# EAGLE board GEN7_Itux_RepRapBoard2-redesign (EAGLE 6.1)
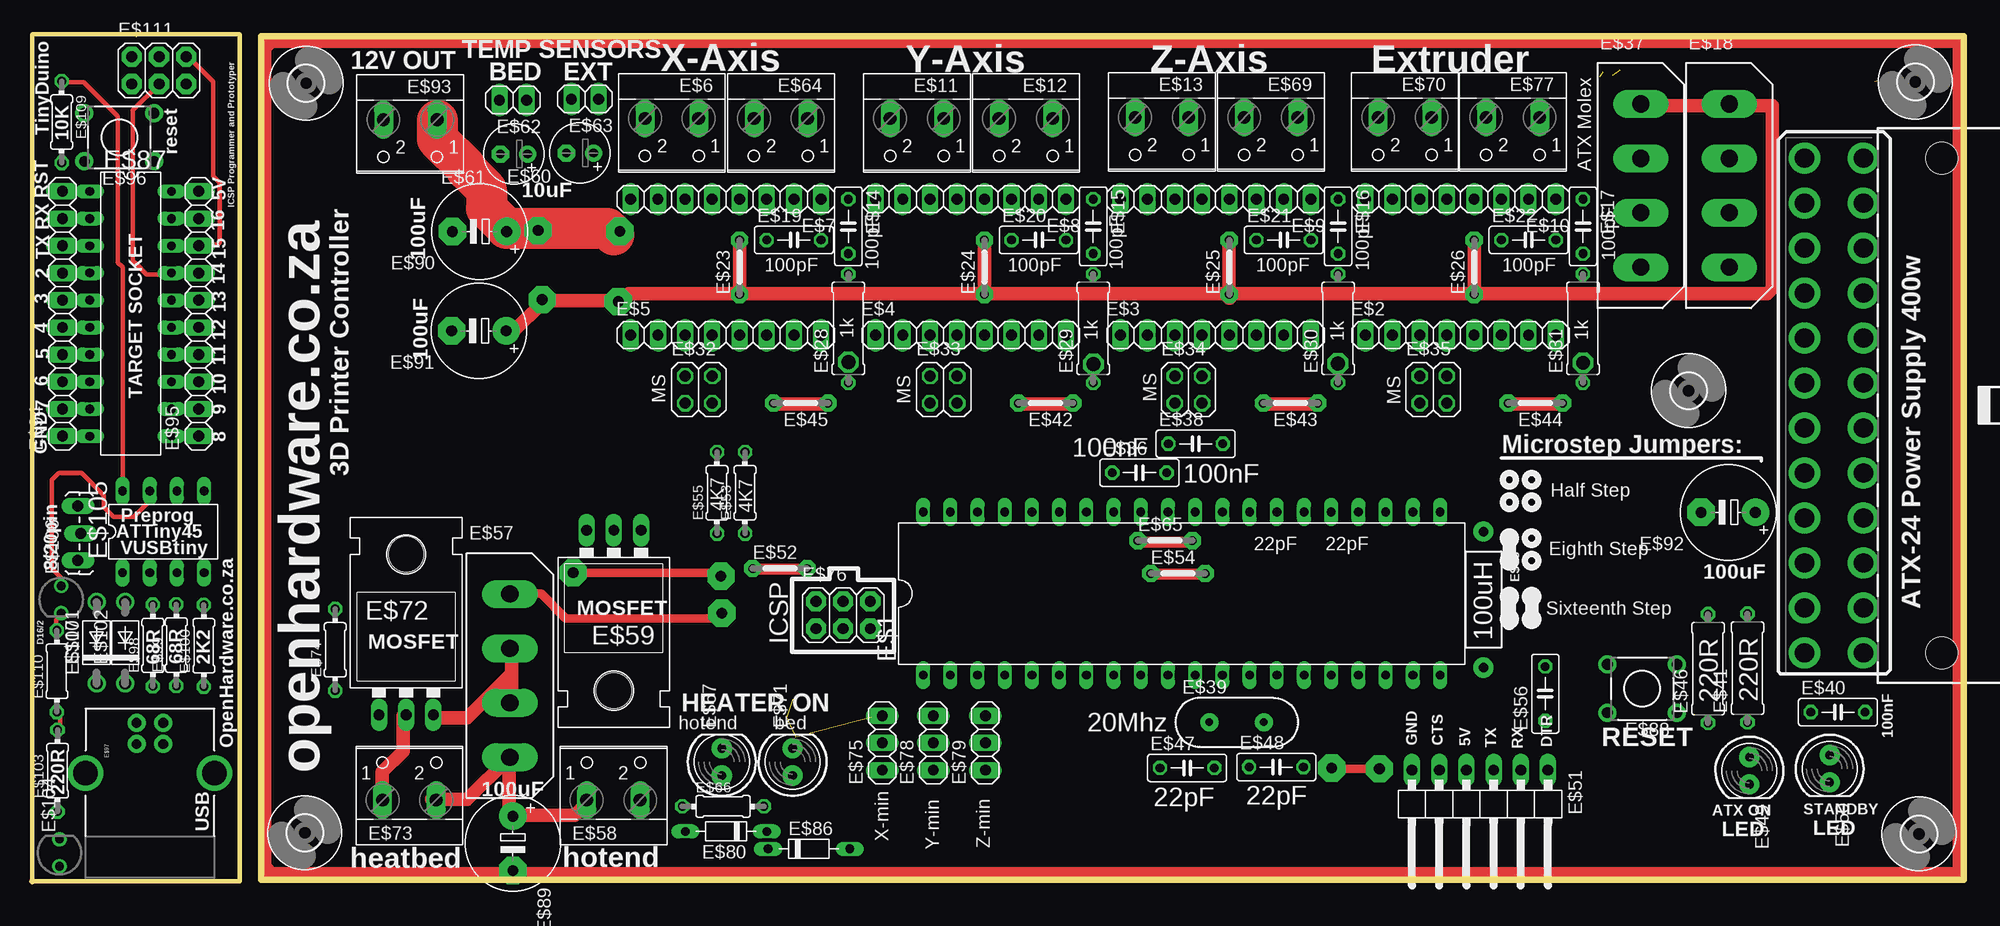
[diagram p0: board, top side]
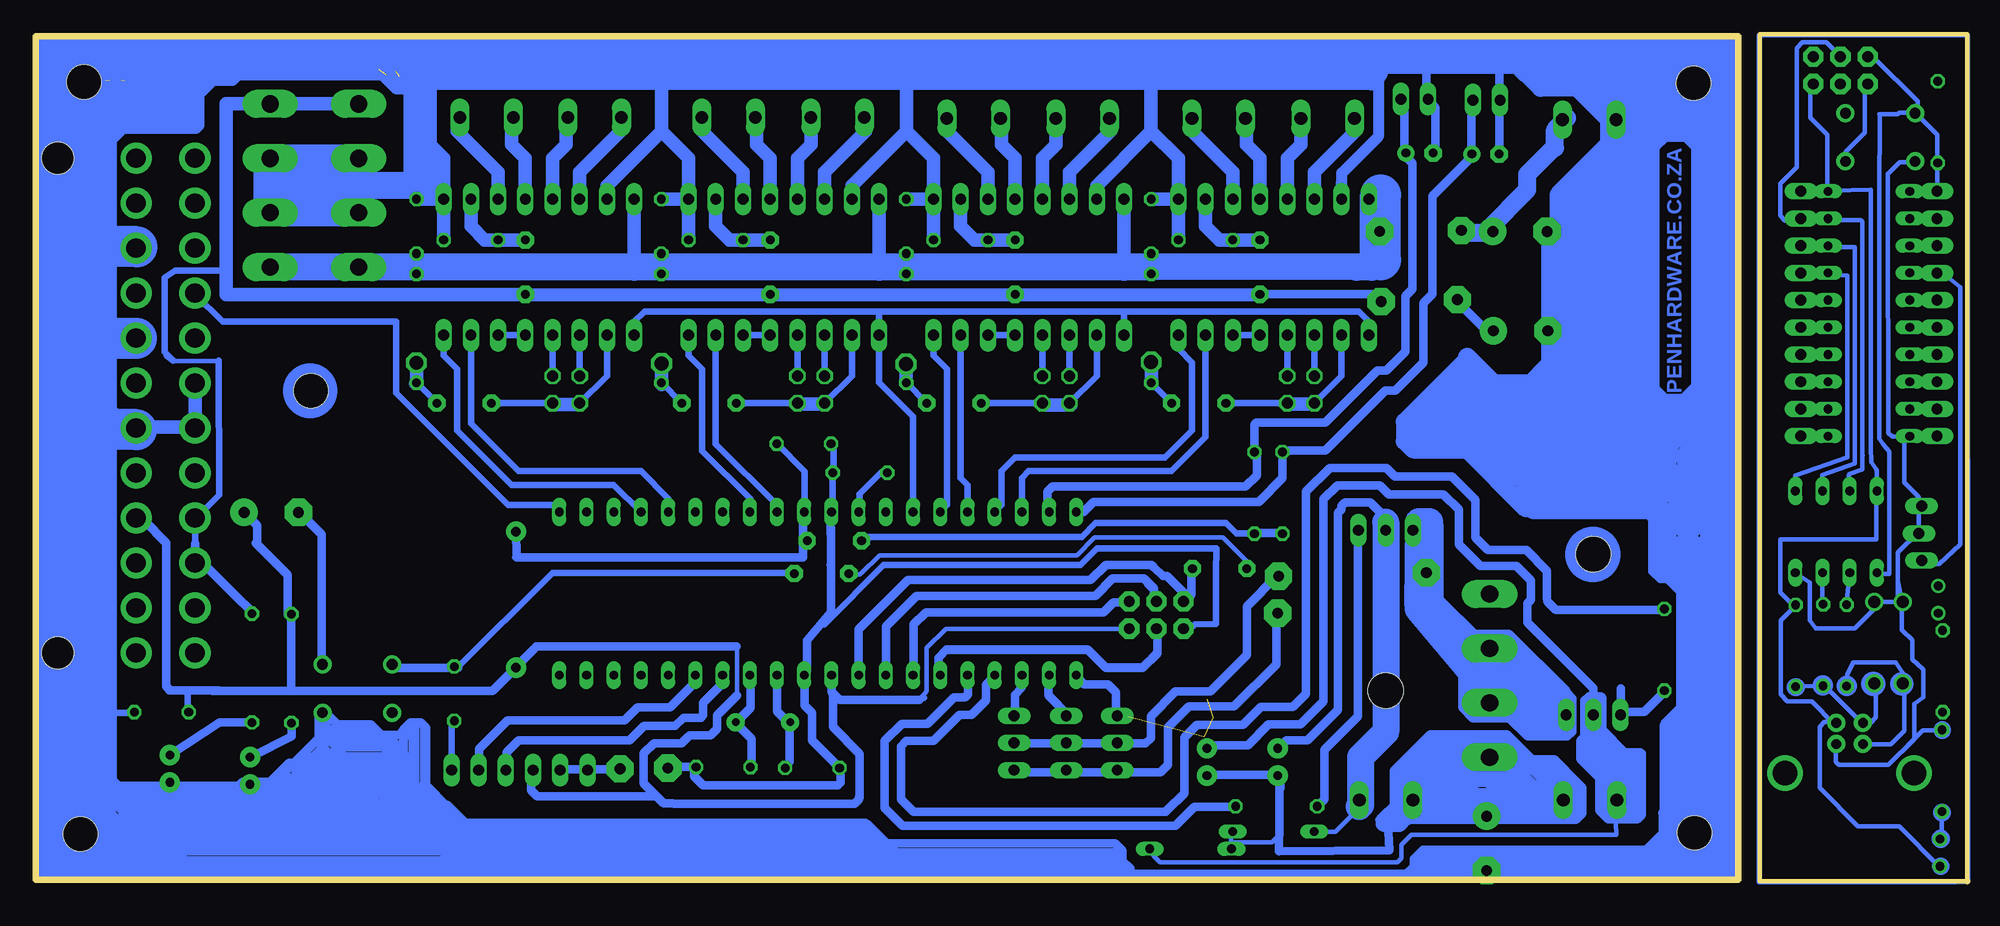
[diagram p1: board, bottom side, seen from below]

Size 180.39 x 79.19 mm. Coordinates in mm from the lower left corner, seen from the top.
Outline: 21.54,0.23 180.39,0.23 180.39,78.96 21.43,78.96 21.43,0.23
Outline: 0,0.08 19.44,0.08 19.44,79.19 0.08,79.19 0.08,0
Copper layers (1*16): Top 0.035mm / dielectric 1.5mm / Bottom 0.035mm
Design rules: minimum track width 10mil, minimum drill 24mil, track to track 8mil, track to pad 8mil, pad to pad 8mil, via to via 8mil, smd to smd 8mil, copper to edge 40mil, drill to drill 8mil, minimum pad ring 10mil, minimum via ring 8mil, stop-mask expansion 4mil, vias tented up to drill 0mil, thermal gap 10mil

## Footprints (pad centres in the part's own frame; a part is rotated, then mirrored left to right if it is on the bottom)
DIL40 = drill 0.813 long: 1 -24.13,-7.62; 2 -21.59,-7.62; 3 -19.05,-7.62; 4 -16.51,-7.62; 5 -13.97,-7.62; 6 -11.43,-7.62; 7 -8.89,-7.62; 8 -6.35,-7.62; 9 -3.81,-7.62; 10 -1.27,-7.62; 11 1.27,-7.62; 12 3.81,-7.62; 13 6.35,-7.62; 14 8.89,-7.62; 15 11.43,-7.62; 16 13.97,-7.62; 17 16.51,-7.62; 18 19.05,-7.62; 19 21.59,-7.62; 20 24.13,-7.62; 21 24.13,7.62; 22 21.59,7.62; 23 19.05,7.62; 24 16.51,7.62; 25 13.97,7.62; 26 11.43,7.62; 27 8.89,7.62; 28 6.35,7.62; 29 3.81,7.62; 30 1.27,7.62; 31 -1.27,7.62; 32 -3.81,7.62; 33 -6.35,7.62; 34 -8.89,7.62; 35 -11.43,7.62; 36 -13.97,7.62; 37 -16.51,7.62; 38 -19.05,7.62; 39 -21.59,7.62; 40 -24.13,7.62
1X08 = drill 1.016 long: 1 -8.89,0; 2 -6.35,0; 3 -3.81,0; 4 -1.27,0; 5 1.27,0; 6 3.81,0; 7 6.35,0; 8 8.89,0
W237-102 = drill 1.194 long: 1 -2.5,-1.27; 2 2.5,-1.27
C050-025X075 = drill 0.813 octagon: 1 -2.54,0; 2 2.54,0
9090-4V = drill 1.6 pad 2.6 long: 1 -7.62,0; 2 -2.54,0; 3 2.54,0; 4 7.62,0
05 = drill 0.813 pad 1.6 octagon: 1 -2.54,0; 2 2.54,0
ATX24_RIGHT_ANGLE = drill 1.8 pad 2.9: 1 23.1,4.76; 2 18.9,4.76; 3 14.7,4.76; 4 10.5,4.76; 5 6.3,4.76; 6 2.1,4.76; 7 -2.1,4.76; 8 -6.3,4.76; 9 -10.5,4.76; 10 -14.7,4.76; 11 -18.9,4.76; 12 -23.1,4.76; 13 23.1,10.26; 14 18.9,10.26; 15 14.7,10.26; 16 10.5,10.26; 17 6.3,10.26; 18 2.1,10.26; 19 -2.1,10.26; 20 -6.3,10.26; 21 -10.5,10.26; 22 -14.7,10.26; 23 -18.9,10.26; 24 -23.1,10.26 | hole 3: -23.1,-2.54; 23.1,-2.54
0309/10 = drill 0.813 octagon: 1 -5.08,0; 2 5.08,0
2X02 = drill 1.016 octagon: 1 -1.27,-1.27; 2 -1.27,1.27; 3 1.27,-1.27; 4 1.27,1.27
HC49US = drill 0.7 pad 1.651: 1 -2.54,0; 2 2.54,0
LED5MM = drill 0.813 pad 1.88: A -1.27,0; K 1.27,0
1X06/90 = drill 1.016 long: 1 -6.35,-3.81; 2 -3.81,-3.81; 3 -1.27,-3.81; 4 1.27,-3.81; 5 3.81,-3.81; 6 6.35,-3.81
0204/7 = drill 0.813 octagon: 1 -3.81,0; 2 3.81,0
TO-220-ALT = drill 1.016 long: GND 0,-3.81; IN -2.54,-3.81; OUT 2.54,-3.81 | hole 3.302: 0,11.176
E2,5-6 = drill 0.813 pad 1.6: + -1.27,0 | drill 0.813 pad 1.6 octagon: - 1.27,0
1X02 = drill 1.016 long: 1 -1.27,0; 2 1.27,0
AXIAL-0.5 = drill 0.9 pad 1.88: P$1 -6.35,0; P$2 6.35,0
1X03 = drill 1.016 long: 1 -2.54,0; 2 0,0; 3 2.54,0
2X03 = drill 1.016 pad 1.88 octagon: 1 -2.54,-1.27; 2 -2.54,1.27; 3 0,-1.27; 4 0,1.27; 5 2.54,-1.27; 6 2.54,1.27
D-7.5 = drill 0.813 long: A 3.81,0; C -3.81,0
3,2 = hole 3.2: 0,0
DIL20 = drill 0.813 long: 1 -11.43,-3.81; 2 -8.89,-3.81; 3 -6.35,-3.81; 4 -3.81,-3.81; 5 -1.27,-3.81; 6 1.27,-3.81; 7 3.81,-3.81; 8 6.35,-3.81; 9 8.89,-3.81; 10 11.43,-3.81; 11 11.43,3.81; 12 8.89,3.81; 13 6.35,3.81; 14 3.81,3.81; 15 1.27,3.81; 16 -1.27,3.81; 17 -3.81,3.81; 18 -6.35,3.81; 19 -8.89,3.81; 20 -11.43,3.81
TL1105 = drill 1 pad 1.676: 1 -2.25,3.25; 2 2.25,3.25; 3 -2.25,-3.25; 4 2.25,-3.25
E5-8,5 = drill 1.016 pad 2.54: + -2.54,0 | drill 1.016 pad 2.54 octagon: - 2.54,0
1X10 = drill 1.016 long: 1 -11.43,0; 2 -8.89,0; 3 -6.35,0; 4 -3.81,0; 5 -1.27,0; 6 1.27,0; 7 3.81,0; 8 6.35,0; 9 8.89,0; 10 11.43,0
USB-B-PTH = drill 0.914 pad 1.676: D+ 0,1.25; D- 1.981,1.25; GND 0,-1.25; VBUS 1.981,-1.25 | drill 2.286: S1 -2.718,-6.02; S2 -2.718,6.02
DO41-7 = drill 1.118: A 3.81,0; C -3.81,0
LED3MM-NS = drill 0.813: A -1.27,0; K 1.27,0
DIL8 = drill 0.813 long: 1 -3.81,-3.81; 2 -1.27,-3.81; 3 1.27,-3.81; 4 3.81,-3.81; 5 3.81,3.81; 6 1.27,3.81; 7 -1.27,3.81; 8 -3.81,3.81
1X03_LOCK_LONGPADS = drill 1.016 long: 1 0,0; 2 2.54,-0.254; 3 5.08,0

## Placement (x,y rotation side)
E$1  [DIL40]  107.37,26.94 0 top
E$2  [1X08]  133.4,51.07 0 top
E$3  [1X08]  110.54,51.07 0 top
E$4  [1X08]  87.68,51.07 0 top
E$5  [1X08]  64.82,51.07 0 top
E$6  [W237-102]  59.78,70.02 180 top
E$7  [1X08]  64.82,63.77 180 top
E$8  [1X08]  87.68,63.77 180 top
E$9  [1X08]  110.54,63.77 180 top
E$10  [1X08]  133.4,63.77 180 top
E$11  [W237-102]  82.65,70.02 180 top
E$12  [W237-102]  92.83,70.02 180 top
E$13  [W237-102]  105.53,70.12 180 top
E$14  [C050-025X075]  76.25,61.23 270 top
E$15  [C050-025X075]  99.11,61.23 270 top
E$16  [C050-025X075]  121.97,61.23 270 top
E$17  [C050-025X075]  144.83,61.23 270 top
E$18  [9090-4V]  158.49,65.04 270 top
E$19  [C050-025X075]  71.17,59.96 0 top
E$20  [C050-025X075]  94.03,59.96 0 top
E$21  [C050-025X075]  116.89,59.96 0 top
E$22  [C050-025X075]  139.75,59.96 0 top
E$23  [05]  66.09,57.42 90 top
E$24  [05]  88.95,57.42 90 top
E$25  [05]  111.81,57.42 90 top
E$26  [05]  134.67,57.42 90 top
E$27  [ATX24_RIGHT_ANGLE]  175.77,44.5 90 top
E$28  [0309/10]  76.25,51.7 90 top
E$29  [0309/10]  99.11,51.7 90 top
E$30  [0309/10]  121.97,51.7 90 top
E$31  [0309/10]  144.83,51.7 90 top
E$32  [2X02]  62.28,45.99 0 top
E$33  [2X02]  85.14,45.99 0 top
E$34  [2X02]  108,45.99 0 top
E$35  [2X02]  130.86,45.99 0 top
E$36  [C050-025X075]  103.43,38.22 0 top
E$37  [9090-4V]  150.23,65.04 270 top
E$38  [C050-025X075]  108.67,40.93 0 top
E$39  [HC49US]  112.5,14.92 0 top
E$40  [C050-025X075]  168.63,15.87 0 top
E$41  [0309/10]  160.19,19.98 90 top
E$42  [05]  94.67,44.72 180 top
E$43  [05]  117.53,44.72 180 top
E$44  [05]  140.39,44.72 180 top
E$45  [05]  71.81,44.72 180 top
E$46  [0309/10]  156.5,19.93 90 top
E$47  [C050-025X075]  107.88,10.65 0 top
E$48  [C050-025X075]  116.2,10.73 0 top
E$49  [LED5MM]  160.37,10.4 270 top
E$50  [LED5MM]  167.86,10.59 270 top
E$51  [1X06/90]  135.22,6.65 180 top
E$52  [05]  69.87,29.27 0 top
E$53  [0204/7]  66.61,36.35 90 top
E$54  [05]  107.03,28.8 0 top
E$55  [0204/7]  64,36.35 90 top
E$56  [C050-025X075]  141.31,17.59 90 top
E$57  [9090-4V]  44.67,19.28 270 top
E$58  [W237-102]  54.33,8.94 0 top
E$59  [TO-220-ALT]  54.37,29.05 180 top
E$60  [E2,5-6]  51.21,68.08 180 top
E$61  [E2,5-6]  45.05,67.98 180 top
E$62  [1X02]  44.95,73.02 180 top
E$63  [1X02]  51.67,73.12 180 top
E$64  [W237-102]  69.96,70.02 180 top
E$65  [05]  105.83,31.88 0 top
E$66  [0204/7]  64.57,7.07 0 top
E$67  [LED5MM]  64.45,11.22 90 top
E$68  [AXIAL-0.5]  135.55,26.37 270 top
E$69  [W237-102]  115.7,70.12 180 top
E$70  [W237-102]  128.21,70.12 180 top
E$71  [LED5MM]  71.06,11.22 90 top
E$72  [TO-220-ALT]  34.98,19.43 0 top
E$73  [W237-102]  35.28,8.94 0 top
E$74  [0204/7]  28.35,21.69 90 top
E$75  [1X03]  79.43,13 90 top
E$76  [2X03]  75.77,24.93 0 top
E$77  [W237-102]  138.29,70.12 180 top
E$78  [1X03]  84.18,13 90 top
E$79  [1X03]  89.04,13 90 top
E$80  [D-7.5]  64.84,4.73 180 top
E$81  [3,2]  25.64,74.59 0 top
E$82  [3,2]  25.52,4.61 0 top
E$83  [3,2]  176.2,4.49 0 top
E$84  [3,2]  175.86,74.71 0 top
E$85  [3,2]  154.69,45.88 0 top
E$86  [D-7.5]  72.57,3.11 0 top
E$87  [DIL20]  9.25,53.07 270 top
E$88  [TL1105]  150.36,18.07 90 top
E$89  [E5-8,5]  44.94,3.62 270 top
E$90  [E5-8,5]  41.83,60.75 180 top
E$91  [E5-8,5]  41.77,51.47 180 top
E$92  [E5-8,5]  158.4,34.53 180 top
E$93  [W237-102]  35.36,69.91 180 top
E$94  [1X10]  2.9,53.07 90 top
E$95  [1X10]  15.6,53.07 90 top
E$96  [TL1105]  8.2,69.55 90 top
E$97  [USB-B-PTH]  11.06,12.89 90 top
E$98  68RD+  [0204/7]  11.33,22.1 90 top
E$99  68Rd-  [0204/7]  13.53,22.13 90 top
E$100  2K2  [0204/7]  16.1,22.06 90 top
E$101  [DO41-7]  6.08,22.35 90 top
E$102  [DO41-7]  8.75,22.35 90 top
E$103  2K2  [0204/7]  2.44,10.4 90 top
E$104  [LED3MM-NS]  2.62,2.74 90 top
E$105  [DIL8]  12.31,32.71 0 top
E$106  [1X03_LOCK_LONGPADS]  4.34,30.02 90 top
E$107  [LED3MM-NS]  2.78,26.38 270 top
E$109  [0204/7]  2.82,70.97 270 top
E$110  [0204/7]  2.38,19.68 90 top
E$111  [2X03]  11.91,75.79 0 top

## Library data of the parts
E$1 E$87 = atmel
E$2-E$5 E$7-E$10 E$32-E$35 E$51 E$62 E$63 E$75 E$78 E$79 E$94 E$95 = pinhead
E$6 E$11-E$13 E$58 E$64 E$69 E$70 E$73 E$77 E$93 = con-wago-500
E$14-E$17 E$19-E$22 E$28-E$31 E$36 E$38 E$40 E$41 E$46-E$48 E$53 E$55 E$56 E$60 E$61 E$66 E$74 E$89-E$92 E$98-E$100 E$103 E$109 E$110 = rcl
E$18 E$37 E$57 = con-thomas-betts
E$23-E$26 E$42-E$45 E$52 E$54 E$65 = jumper
E$27 E$76 E$97 E$106 E$111 = SparkFun-Connectors
E$39 = SparkFun-FreqCtrl
E$49 E$50 E$67 E$71 E$104 E$107 = SparkFun-LED
E$59 E$72 = SparkFun-PowerIC
E$68 = SparkFun-Passives
E$80 E$86 = diode
E$81-E$85 = holes
E$88 E$96 = switch
E$101 E$102 = ref-packages-longpad
E$105 = on-semiconductor

## Nets
5VRAIL: E$26.1 E$37.1
12VRAIL: E$8.8 E$9.8 E$10.8 E$14.2 E$15.2 E$16.2 E$17.2
GNDPLANE: E$7.1 E$8.1 E$8.7 E$9.1 E$9.7 E$10.7 E$14.1 E$15.1 E$16.1 E$18.3 E$19.2 E$20.2 E$21.2 E$37.2 E$37.3
S$1: E$7.3
S$2: E$7.4
S$3: E$7.5
S$4: E$7.6
S$5: E$8.3
S$6: E$8.6
S$7: E$8.5
S$8: E$8.4
S$9: E$9.6
S$10: E$9.5
S$11: E$9.4
S$12: E$9.3
S$13: E$10.6
S$14: E$10.5
S$15: E$10.4
S$16: E$10.3
S$18: E$7.2 E$19.1 E$23.2
S$19: E$10.1 E$17.1 E$22.2
S$20: E$8.2 E$20.1 E$24.2
S$21: E$1.21
S$23: E$9.2 E$21.1 E$25.2
S$25: E$10.2 E$22.1 E$26.2
S$26: E$5.2 E$32.1
S$27: E$5.3 E$32.2
S$28: E$5.4 E$32.4
S$29: E$4.2 E$33.1
S$30: E$4.3 E$33.2
S$31: E$4.4 E$33.4
S$32: E$3.2 E$34.1
S$33: E$3.3 E$34.2
S$34: E$3.4 E$34.4
S$35: E$2.2 E$35.1
S$36: E$2.3 E$35.2
S$37: E$2.4 E$35.4
S$38: E$5.5 E$5.6
S$39: E$4.5 E$4.6
S$40: E$3.5 E$3.6
S$41: E$2.5 E$2.6
S$42: E$28.1
S$43: E$29.1
S$44: E$30.1
S$45: E$31.1
S$46: E$32.3 E$45.2
S$47: E$1.36 E$4.7
S$48: E$1.38 E$5.7
S$49: E$1.34 E$2.1 E$3.1 E$4.1 E$5.1
S$50: E$33.3 E$42.2
S$51: E$34.3 E$43.2
S$52: E$35.3 E$44.2
S$56: E$1.25 E$2.7
S$57: E$1.37 E$5.8
S$58: E$1.29 E$3.7
S$59: E$1.35 E$4.8
S$60: E$1.28 E$3.8
S$61: E$1.24 E$2.8
S$87: E$1.8
S$99: E$76.6
S$104: E$76.4
S$115: E$76.1
S$121: E$1.6 E$76.3
S$178: E$7.7
S$410: E$96.4
S$411: E$95.9
S$412: E$95.8
S$413: E$87.20
S$414: E$96.3
S$415: E$95.7

## Tracks (layer width: path | path; a pad name or v marks a point on that pad's centre or on a via)
5VRAIL
  Bottom 0.61: 167.69,48.85 168.33,49.48 168.33,56.47 167.38,57.1 162.61,57.1
  Bottom 1.27: 65.85,54.81 E$26.1 162.61,54.88 162.61,57.1 162.61,72.66 E$37.1
12VRAIL
  Bottom 1.27: 124.51,57.42 E$10.8 | 101.65,57.42 E$9.8 | 78.79,57.42 E$8.8 | 144.83,57.42 E$17.2 | 121.97,57.42 E$16.2 | 99.11,57.42 E$15.2 | 76.25,57.42 E$14.2
  Bottom 2.54: 56.38,57.46 76.25,57.42 78.79,57.42 99.11,57.42 101.65,57.42 121.97,57.42 124.51,57.42 144.83,57.42 158.8,57.42
GNDPLANE  (1 unrouted)
  Bottom 0.61: 152.77,75.81 152.83,75.87 146.91,75.87 146.72,75.68
  Bottom 1.27: E$21.2 E$9.1 | E$9.1 119.43,67.58 121.97,70.12 | E$8.1 96.57,67.58 99.11,70.12 | E$7.1 73.71,67.58 76.25,70.12 | 76.25,70.12 76.25,75.2 | E$8.7 81.33,65.04 76.25,70.12 | 99.11,70.12 99.11,75.2 | E$9.7 104.19,65.04 99.11,70.12 | 121.97,70.12 121.97,75.2 | E$10.7 127.05,65.04 121.97,70.12 | E$7.1 E$14.1 | E$8.1 E$15.1 | E$9.1 E$16.1 | E$19.2 E$7.1 | E$20.2 E$8.1
  Bottom 2.54: 55.69,75.2 76.25,75.2 99.11,75.2 121.97,75.2 144.83,75.2 | 144.83,75.2 144.83,65.04 150.23,65.04 E$37.2 | E$37.2 E$37.3 | 144.83,75.2 146.42,75.2 | E$37.2 158.8,67.58 158.8,62.82 E$18.3 150.55,62.5 150.55,65.04 151.5,65.99 156.58,65.99 156.9,65.67 156.9,64.09 152.14,64.09 151.5,64.72
S$1
  Bottom 1.27: E$7.3 68.63,66.31 72.44,70.12 72.44,71.39
S$2
  Bottom 1.27: E$7.4 66.09,67.58 67.36,68.85 67.36,71.39
S$3
  Bottom 1.27: E$7.5 63.55,67.58 62.28,68.85 62.28,71.39
S$4
  Bottom 1.27: E$7.6 61.01,66.31 57.2,70.12 57.2,71.39
S$5
  Bottom 1.27: E$8.3 91.49,66.31 95.3,70.12 95.3,71.39
S$6
  Bottom 1.27: E$8.6 83.87,66.31 80.06,70.12 80.06,71.39
S$7
  Bottom 1.27: E$8.5 86.41,67.58 85.14,68.85 85.14,71.39
S$8
  Bottom 1.27: E$8.4 88.95,67.58 90.22,68.85 90.22,71.39
S$9
  Bottom 1.27: E$9.6 106.73,66.31 102.92,70.12 102.92,71.39
S$10
  Bottom 1.27: E$9.5 109.27,67.58 108,68.85 108,71.39
S$11
  Bottom 1.27: E$9.4 111.81,67.58 113.08,68.85 113.08,71.39
S$12
  Bottom 1.27: E$9.3 114.35,66.31 118.16,70.12 118.16,71.39
S$13
  Bottom 1.27: E$10.6 129.59,66.31 125.78,70.12 125.78,71.39
S$14
  Bottom 1.27: E$10.5 132.13,67.58 130.86,68.85 130.86,71.39
S$15
  Bottom 1.27: E$10.4 134.67,67.58 135.94,68.85 135.94,71.39
S$16
  Bottom 1.27: E$10.3 137.21,66.31 141.02,70.12 141.02,71.39
S$17
  Bottom 2.54: 55.69,57.41 57.09,57.41
S$18
  Bottom 1.27: E$7.2 71.17,61.23 69.9,59.96 E$19.1 E$23.2
S$19
  Bottom 1.27: E$10.1 142.29,67.58 143.56,68.85 143.56,73.93 | E$10.1 E$17.1 | E$22.2 E$10.1
S$20
  Bottom 1.27: E$8.2 94.03,61.23 92.76,59.96 E$20.1 E$24.2
S$21
  Bottom 0.61: 165.47,55.2 165.47,54.88 162.93,52.34 146.74,52.34 146.74,45.67 136.26,35.19 132.13,35.19 E$1.21
S$22  (via drill 1.3 pad 0.61)
  other vias: 76.26,48.55
S$23
  Bottom 1.27: E$9.2 116.89,61.23 115.62,59.96 E$21.1 E$25.2
S$24
  Top 1.27: 66.09,54.72 66.09,59.9
S$25
  Bottom 1.27: E$10.2 139.75,61.23 138.48,59.96 E$22.1 E$26.2
S$26
  Bottom 0.61: E$5.2 58.47,47.26 E$32.1
S$27
  Bottom 0.61: E$32.2 E$5.3
S$28
  Bottom 0.61: E$32.4 E$5.4
S$29
  Bottom 0.61: E$4.2 81.33,47.26 E$33.1
S$30
  Bottom 0.61: E$33.2 E$4.3
S$31
  Bottom 0.61: E$33.4 E$4.4
S$32
  Bottom 0.61: E$3.2 104.19,47.26 E$34.1
S$33
  Bottom 0.61: E$34.2 E$3.3
S$34
  Bottom 0.61: E$34.4 E$3.4
S$35
  Bottom 0.61: E$2.2 127.05,47.26 E$35.1
S$36
  Bottom 0.61: E$35.2 E$2.3
S$37
  Bottom 0.61: E$35.4 E$2.4
S$38
  Bottom 0.61: E$5.5 E$5.6
S$39
  Bottom 0.61: E$4.5 E$4.6
S$40
  Bottom 0.61: E$3.5 E$3.6
S$41
  Bottom 0.61: E$2.5 E$2.6
S$42
  Bottom 0.61: 74.35,44.72 E$28.1
S$43
  Bottom 0.61: 97.21,44.72 E$29.1
S$44
  Bottom 0.61: 120.07,44.72 E$30.1
S$45
  Bottom 0.61: 142.93,44.72 E$31.1
S$46
  Bottom 0.61: E$32.3 E$45.2
S$47
  Bottom 0.61: E$4.7 94.03,37.73 93.4,37.1 E$1.36
S$48
  Bottom 0.61: E$1.38 88.32,37.73 87.68,38.37 74.35,38.37 71.17,41.54 E$5.7
S$49
  Bottom 0.61: E$1.34 98.48,43.45 101.65,46.62 E$3.1 101.65,53.29 | E$5.1 55.93,52.34 56.89,53.29 78.79,53.29 | 78.79,53.29 101.65,53.29 | 101.65,53.29 123.56,53.29 124.51,52.34 E$2.1 | E$4.1 78.79,53.29
S$50
  Bottom 0.61: E$33.3 E$42.2
S$51
  Bottom 0.61: E$34.3 E$43.2
S$52
  Bottom 0.61: E$44.2 132.77,44.72 E$35.3
S$53
  Bottom 2.54: 172.31,76.58 172.69,76.21
S$54
  Bottom 0.406: 13.17,56.73 12.4,56.66 11.27,56.65 11.29,39.65
S$55
  Bottom 0.406: 98.48,20.91 98.48,19.64 98.16,19.32
S$56
  Bottom 0.61: E$2.7 139.75,42.81 135.31,38.37 123.88,38.37 121.34,35.83 E$1.25
S$57
  Bottom 0.61: E$5.8 73.71,49.8 72.44,48.53 72.44,42.18 74.98,39.64 88.95,39.64 90.22,38.37 90.22,35.19 E$1.37
S$58
  Bottom 0.61: E$3.7 116.89,40.91 111.18,35.19 E$1.29
S$59
  Bottom 0.61: E$4.8 96.57,49.16 95.3,47.89 95.3,35.19 E$1.35
S$60
  Bottom 0.61: E$3.8 119.43,49.16 118.16,47.89 118.16,40.27 113.72,35.83 E$1.28
S$61
  Bottom 0.61: E$2.8 142.29,49.16 141.02,47.89 141.02,42.18 135.94,37.1 126.42,37.1 E$1.24
S$62  (3 unrouted)
  Bottom 0.406: 173.83,74.66 173.83,76.26 172.05,76.26 172.05,74.76 173.84,74.76 173.84,74 173.5,74
  Bottom 0.61: 147.61,75.34 152.43,75.34
  Bottom 1.27: 170.55,75.52 170.87,75.52 172.46,73.93 172.46,74.88 | 134.04,75.52 134.99,75.52 135.31,75.83 172.46,75.83 173.41,74.88 173.41,71.71 | 165.47,46.62 165.47,43.13 166.11,42.5 171.19,42.5 171.5,42.81 172.14,42.81 173.41,44.08 | 148.33,75.83 169.28,75.83 173.41,71.71 | 171.19,59.32 173.09,59.32 173.41,59.64 | 171.19,50.75 173.09,50.75 173.41,51.07 | 173.41,71.71 173.41,59.64 | 173.41,59.64 173.41,51.07 | 173.41,51.07 173.41,44.08 | 173.41,44.08 173.41,8.84
S$63
  Top 1.27: 88.95,54.72 88.95,59.86
S$64
  Bottom 0.406: 13.02,59.28 12.25,59.28 10.6,59.28 10.58,58.64 10.58,55.68 10.59,39.78 10.59,39.63
S$65
  Bottom 0.406: 13.05,61.83 12.28,61.83
S$66
  Bottom 2.54: 170.86,2.73 174.1,5.97 174.1,74.83 172.21,76.72
S$67
  Bottom 0.813: 135.75,20.13 135.61,20
S$68
  Top 1.27: 111.86,54.54 111.77,54.54 111.77,59.99
S$69
  Bottom 0.406: 9.88,61.67 9.88,55.82 9.88,39.85 9.85,39.82
S$70
  Bottom 0.61: 144.83,75.06 144.83,75.71 145.29,76.17 155.88,76.17
S$71
  Bottom 0.813: 163.88,17.84 137.75,17.84 135.32,20.28
S$72
  Bottom 0.813: 106.17,32.52 106.17,34.57
S$75
  Bottom 0.813: 133.85,21.78 135.77,19.86
S$76
  Bottom 0.61: 66.46,32.56 68.31,32.56 69.27,33.52 81.43,33.52 82.71,32.25 102.89,32.25 103.28,31.85
S$77  (via drill 1.3 pad 0.61)
  other vias: 144.85,48.49
S$79
  Bottom 0.61: 108.64,33.29 108.75,30.45 135.63,30.32
S$80
  Bottom 0.406: 78.28,23.66 95.42,23.66 97.22,21.85 97.22,17.8 97.88,17.01
  Bottom 0.813: 97.88,17.01 105.33,17.01 106.07,17.77
S$81  (via drill 1.3 pad 0.61)
  other vias: 121.96,48.42
S$82  (via drill 1.3 pad 0.61)
  other vias: 99.14,48.36
S$84
  Bottom 1.27: 76.28,46.54 76.25,46.54 76.25,48.54
S$85
  Bottom 1.27: 99.12,46.57 99.15,46.57 99.15,48.36
S$86
  Bottom 1.27: 121.96,46.48 121.96,48.42
S$87
  Bottom 0.406: 101.02,20.91 E$1.8
S$88
  Bottom 0.406: 163.27,48.64 167.52,48.64 167.74,48.86
S$89
  Bottom 1.27: 144.9,46.57 144.83,46.57 144.83,48.51
S$90
  Bottom 0.813: 66.6,32.58 63.94,32.58 63.87,32.52
S$91
  Bottom 0.813: 83.45,34.53 82.61,34.53 81.64,35.5 66.21,35.5 64,37.71 64,40.05 63.94,40.11
S$92
  Bottom 0.61: 100.71,38.25 101.47,38.25 103.47,36.25 103.47,34.57 103.68,34.36
S$93
  Bottom 0.813: 170.93,33.79 170.31,33.79 168.21,31.69 168.21,18.3 167.82,17.91
S$94
  Bottom 0.813: 135.72,32.95 135.52,32.81 135.48,30.33 108.77,30.33 108.74,34.06 108.54,34.36 108.76,34.57
S$95
  Bottom 0.813: 98.42,19.38 98.42,24.07 97.29,25.19 80.72,25.19 79.78,26.13 78.35,26.13 78.32,26.17
S$96
  Top 1.27: 134.67,54.72 134.67,59.95
S$97
  Top 1.27: 69.13,44.64 74.38,44.64
S$98
  Top 1.27: 92.01,44.64 97.13,44.64 97.13,44.77
S$99
  Bottom 0.406: E$76.6 79.58,26.2
S$100
  Top 1.27: 114.9,44.64 120.02,44.64 120.02,44.71
S$101
  Top 1.27: 137.78,44.64 142.97,44.64 142.97,44.58
S$102
  Bottom 1.27: 61.01,44.63 63.66,44.63
S$103
  Bottom 0.813: 101,19.19 101,23.88 98.15,26.73 81.47,26.73 79.85,28.35 76.93,28.35 75.99,27.41 75.99,26.36 75.88,26.24
S$104
  Bottom 0.406: E$76.4 75.77,26.83 76.72,27.79
S$105
  Bottom 0.813: 73.22,26.28 73.22,27 74.79,28.57 75.17,28.57 75.99,29.4 | 75.99,29.4 | 75.99,29.4 76.22,29.62 80.49,29.62 81.92,28.2 98.94,28.2 103.55,23.58 103.55,19.3 103.52,19.26
S$106
  Bottom 1.27: 83.75,44.52 86.4,44.52 86.4,44.74
S$107
  Bottom 0.813: 96.09,19.19 96.09,20.95 95.34,21.7 82.18,21.7 80.45,19.98 77.08,19.98 75.69,21.37 75.69,23.77
S$108
  Bottom 0.61: 165.3,30.19 165.51,30.85 165.47,34.24 165.15,34.24 163.25,36.15 163.29,48.71
S$109
  Bottom 0.813: 106.07,17.82 106.07,19.83
S$110
  Bottom 0.813: 106.14,33.08 106.14,25.21 108.38,22.59 108.38,19.71 108.69,19.39
S$111
  Bottom 0.813: 111.17,19.16 111.17,15.96 110,14.8 110,11.21 110.62,10.59
S$112
  Bottom 0.813: 113.66,19.31 113.66,16.27 115.13,14.8
S$113
  Bottom 1.27: 106.71,44.63 109.35,44.63
S$114
  Bottom 1.27: 129.56,44.58 132.26,44.58
S$115
  Bottom 0.406: E$76.1 72.59,23.66
S$116
  Bottom 0.813: 113.58,10.82 113.58,13.4 114.98,14.8
S$117
  Bottom 0.61: 167.56,48.71 168.14,49.16
S$118
  Bottom 0.406: 105.26,9.27 105.49,9.03 | 118.95,10.67 118.87,10.75
  Bottom 0.813: 108.6,19.39 108.6,16.51 107.9,15.81 107.9,13.23 105.26,10.59 105.26,9.27 | 105.49,9.03 118.09,9.03 118.95,9.89 118.95,10.67
S$119
  Bottom 0.406: 114.9,17.44 114.9,22.13 114.94,22.01 | 133.67,22.01 134.99,20.68
  Bottom 0.813: 119.33,13.71 117.39,13.71 116.77,14.33 116.77,15.58 114.9,17.44 | 114.94,22.01 133.67,22.01
S$120
  Bottom 0.61: 146.09,74.27 146.12,74.23 147.02,74.23 147.8,75.01
S$121
  Bottom 0.406: E$76.3 75.77,21.65 77.02,20.25 80.48,20.25 81.71,21.5 95.35,21.5 95.94,20.91 E$1.6
S$122
  Bottom 0.813: 144.94,73.95 146.75,73.95 148.05,75.25 161.46,75.25 161.98,74.73 163.79,74.73 165.02,73.5 165.02,70.64 165.41,70.26 172.22,70.26 173.25,69.22
S$123
  Bottom 0.813: 172.87,70.64 166,70.64 165.54,71.1 165.54,73.95 164.44,75.06 162.5,75.06 162.37,75.19 168.97,75.19 172.8,71.36 166.26,71.36 166.19,71.42 166.19,74.02 165.41,74.8 168.59,74.8 171.57,71.81 166.9,71.81 166.84,71.88 166.84,72.33 | 166.84,73.05 166.84,74.02 166.52,74.34 168.13,74.34 170.34,72.14 167.03,72.14 166.84,72.33 | 166.84,72.33 166.84,73.05 | 166.84,73.05 167.55,73.76 168.07,73.76 169.11,72.72 167.49,72.72 167.49,73.11 168.14,73.11 168.2,73.17 167.81,73.17
S$124
  Bottom 0.813: 103.52,7.97 103.52,7.74 103.93,7.33
S$125
  Bottom 0.813: 165.51,31.63 165.51,30.5 161.96,26.96 160.01,25.09 160.39,25
S$126
  Bottom 0.406: 173.84,9.22 173.55,9.22
S$127
  Bottom 0.406: 172.73,73.5 172.8,73.5 172.8,73.33
S$128
  Bottom 0.813: 167.92,17.88 163.29,17.88
S$129
  Bottom 0.406: 173.72,74.83 173.59,74.83 173.59,75.87
S$130
  Bottom 0.406: 173.56,75.86 173.19,75.86 173.19,75.88
S$131
  Bottom 0.813: 156.51,18.02 156.52,25.01
S$132
  Bottom 1.27: 55.97,58.37 55.97,57.66 55.97,63.96
S$133
  Bottom 0.61: 106.01,34.73 106.01,38.25 105.95,38.3
S$134
  Bottom 0.61: 108.6,34.68 108.6,38.36 111.25,41.01
S$135
  Bottom 0.61: 105.9,38.41 105.9,40.74 106.06,40.9
S$136
  Bottom 0.61: 166.19,15.81 166.19,17.53 166.27,17.6
S$137
  Bottom 0.61: 73.14,23.43 72.68,23.59 72.16,24.06 70.22,24.12 70.22,28.87 70.16,31.14 75.09,31.15 81.31,31.15 82.87,29.64
S$138
  Bottom 0.61: 106.14,29.47 106.27,29.6
S$139
  Bottom 0.61: 82.88,29.63 101.22,29.6 106.75,24.07
S$140
  Bottom 0.61: 171.17,15.81 173.11,15.81 173.42,16.12
S$141
  Bottom 0.813: 160.1,14.9 163.2,14.9 167.84,11.89
S$142
  Bottom 0.813: 156.5,14.83 156.5,13.62 160.28,11.71
S$143
  Bottom 0.813: 160.46,9.01 172.7,9.01 173.2,9.5
S$144
  Bottom 0.406: 103.47,7.86 104.01,7.32
  Bottom 0.813: 105.96,17.44 105.96,14.48 103.47,11.99 103.47,7.86 | 104.01,7.32 120.81,7.32
S$145  (via drill 1 pad 2.54)
  other vias: 121.37,10.64
S$146
  Bottom 0.813: 118.9,10.77 121.3,10.77 121.56,10.51
S$147
  Bottom 0.813: 120.91,7.33 121.75,7.33 123.64,9.21 123.64,12 122.66,12.98 120.07,12.98 119.42,13.63
S$148  (via drill 1 pad 2.54)
  other vias: 125.84,10.58
S$149
  Top 0.813: 121.2,10.59 126.1,10.59 126.17,10.51
S$150
  Bottom 0.813: 125.82,10.51 131.5,10.51
S$151
  Bottom 0.813: 122.47,8.02 133.6,8.02 134.14,8.57 134.14,10.28 133.99,10.43
S$152
  Bottom 0.813: 116.31,19.23 116.31,18.51 118.07,16.75 118.07,15.58 118.29,15.36 119.91,15.36 120.68,14.59 123.6,14.59 124.95,13.24 135.3,13.24 136.43,12.11 136.43,10.49 136.52,10.4
S$153
  Bottom 0.813: 118.79,19.19 118.79,18.69 121.17,16.3 124.19,16.3 125.4,15.09 136.34,15.09 138.99,12.43 138.99,10.49 139.08,10.4
S$154
  Bottom 0.406: 67.22,29.17 67.22,29.85 69.54,32.17 81.54,32.17 83.19,30.52 101.6,30.52 103.33,28.8
S$155
  Bottom 0.813: 72.51,29.27 72.51,26.84 73.16,26.19
S$156
  Bottom 0.406: 103.44,28.72 104.53,28.72 104.57,28.76
S$157
  Bottom 0.813: 85.92,34.46 85.92,36.48 85.46,36.93 67.44,36.93 66.4,37.97 66.4,39.92 66.66,40.18
S$158  (3 unrouted)
S$159
  Bottom 0.813: 170.58,3.57 173.68,6.85 173.68,9.11
S$160
  Bottom 1.016: 25.91,0.64 172.76,0.64 176.69,4.56 171.74,4.56 170.24,3.07
S$161
  Bottom 0.813: 66.61,40.39 66.61,42.73 66.42,42.91 59.99,42.91 55.13,47.78 54.29,47.78 52.52,49.55 52.52,54.7 51.86,55.35 51.86,67.14 52.61,67.89 52.61,72.57 53.17,73.13
S$162
  Bottom 0.813: 64.09,40.29 59.99,40.29 54.38,45.91 53.45,45.91 50.83,48.53 50.83,54.05 49.99,54.89 49.99,64.06 46.35,67.7 46.35,72.75 46.07,73.03
S$163
  Bottom 0.406: 143.56,64.09 143.56,65.36 | 143.56,67.9 143.56,65.36 | 143.56,65.36 142.93,64.72 142.93,67.26 143.25,67.58 143.25,64.72 143.25,64.4
S$164
  Bottom 0.61: 97.71,17.21 97.48,17.21
S$165
  Bottom 0.61: 109.45,28.88 132.13,28.88 141.22,19.8
S$166
  Bottom 0.813: 49.71,67.7 49.71,72.29 50.55,73.13 50.55,76.21 50.37,76.4
S$167
  Bottom 0.813: 43.74,67.89 43.74,76.12 43.93,76.31
S$168
  Bottom 0.61: 141.54,10.58 141.54,14.8 141.28,15.06
S$169
  Bottom 3.81: 169.58,2.23 171.53,2.23 174.12,4.82 174.12,4.89 174.94,5.72 174.94,73.17 172.06,76.05
S$170
  Bottom 3.81: 170.97,42.25 173.24,42.25
S$171
  Bottom 0.61: 141.35,20.05 141.35,20.18 141.48,20.31
S$172
  Bottom 3.81: 170.97,50.76 174.54,50.76
S$173
  Bottom 2.54: 44.84,16.38 44.84,22.21
S$174
  Bottom 3.81: 170.91,59.33 174.15,59.33 174.21,59.26
S$175
  Bottom 3.81: 38.61,15.26 40.37,15.31 46.73,21.67
S$176
  Bottom 2.54: 45.67,22.28 46.06,21.89 46.06,16.67 45.75,16.36
S$177
  Bottom 2.54: 55.55,63.93 55.55,57.77 55.39,57.61 55.39,57.99
S$178
  Bottom 1.016: E$7.7 58.47,65.41
S$179
  Bottom 1.016: 58.47,63.72 58.47,66.21 55.01,69.66 55.01,75.07 54.69,75.4
S$180
  Bottom 2.54: 44.28,11.67 47.53,11.67 51.56,7.63
S$181
  Bottom 2.54: 44.39,10.43 46.85,10.43 50.33,6.95 52.12,6.95 52.35,7.18 52.35,9.76 49.55,12.56 43.83,12.56 43.38,12.11 43.38,10.77 44.06,10.1 47.86,10.1 49.77,8.19
S$182
  Bottom 2.54: 44.73,19.07 44.73,19.19 51.34,25.8 51.28,33.65 50.27,33.65 50.22,33.09 50.22,26.13 46.19,22.1
S$183
  Bottom 2.54: 45.06,18.73 45.62,18.73 51.32,25.52
S$184
  Bottom 2.54: 54.37,33.63 54.37,14.02 56.72,11.67 56.72,7.18 56.83,7.07
S$185
  Top 1.016: 103.02,31.75 108.27,31.75 108.44,31.87 | 104.45,28.78 109.7,28.78
S$186
  Bottom 0.61: 83.32,34.68 82.45,34.68 81.64,35.49 78.19,35.49 78.13,35.55
S$187
  Bottom 0.61: 85.86,34.52 85.86,36.41 85.32,36.95
S$188
  Bottom 0.61: 78.08,36.95 78.08,36.9 85.48,36.9 85.75,36.63
S$189
  Bottom 0.813: 56.94,32.86 56.94,15.48 60.08,12.34 60.08,7.74 60.75,7.07
S$190
  Bottom 3.81: 54.85,58.11 54.85,64.19
S$191
  Bottom 0.813: 54.25,33.78 54.25,34.34
S$192
  Bottom 0.813: 52.61,6.43 54.19,6.43 54.02,2.97 64.35,2.85 64.28,5.59 64.28,8.96
S$193
  Bottom 0.813: 64.2,8.76 64.2,9.73 64.46,9.99 71.07,9.99 71.2,9.86
S$194
  Bottom 0.813: 53.95,33.09 53.95,33.61 55.77,35.43 58.17,35.43 58.49,35.1 58.49,34.78 58.82,34.45 58.82,16.09 61.67,13.24 63.61,13.24 64.33,12.52
S$195
  Bottom 2.54: 172.21,76.72 42.64,76.72
S$196
  Bottom 3.81: 37.62,7.59 41.07,7.59 44.53,11.05
S$197
  Bottom 3.81: 32.43,7.48 32.43,9.86 34.16,11.59
S$198
  Bottom 2.184: 35.13,16.08 35.13,12.35 33.89,11
S$199
  Bottom 0.813: 32.44,15.88 30.21,15.88 28.43,17.66
S$200
  Bottom 0.813: 34.96,15.9 34.96,18.11 41.12,24.27 41.12,26.02 40.79,26.34 40.79,28.16 42.16,29.52 45.53,29.52 47.54,31.53 47.54,34.78 48.96,36.21 54.08,36.21 54.93,37.05 58.88,37.05 60.18,35.75 60.18,16.87 62.32,14.73 65.3,14.73 67.24,12.78 70.75,12.78 71.01,12.52
S$201
  Bottom 0.813: 36.79,5.9 53.17,5.9 53.58,6.3 53.58,10.41 50.2,13.78 43.05,13.78 37.74,8.47 38.68,8.47 42.33,12.11 42.33,6.35 42.51,6.17 49.53,6.17 49.57,6.21 43.54,6.21 43.14,6.62 49.21,6.62 49.44,6.84 42.28,6.84 42.15,6.98 48.58,6.98 48.9,7.29 42.1,7.29 41.97,7.43 48.13,7.43 49.17,8.47 45.84,8.47 45.75,8.38 45.66,8.38 | 44.13,8.38 45.66,8.38 | 45.66,8.38 45.7,8.33 47.91,8.33 48.22,8.01 42.64,8.01 42.6,7.97
S$202
  Bottom 0.813: 41.7,11.44 38.64,11.44 36.48,9.28 35.98,8.78 35.98,6.44 36.61,5.81 53.08,5.81 53.49,6.21
S$203
  Bottom 0.813: 37.2,8.83 37.2,8.87 39.09,10.76 39.72,10.76 39.76,10.81
S$204
  Bottom 0.813: 53.37,7.7 53.37,7.01 53.51,5.53 53.03,6.8 53.52,7.23
S$205
  Bottom 0.813: 54.93,5.79 53.46,6.01 52.4,6.02
S$206
  Bottom 0.813: 51.06,7.09 51.06,6.82 52.08,5.8 54.57,5.8 54.69,5.68
S$207
  Bottom 0.813: 31,5.88 33.58,5.88 34.41,6.71 34.41,9.72 36.21,11.52 36.21,13.19 35.65,13.76 35.65,15.88 35.82,16.06 35.82,16.95 35.41,17.36 34.3,17.36 34.15,17.21 34.15,14.19 32.09,12.13 30.59,12.13 30.46,12 30.46,6.29 30.87,5.88
S$208
  Bottom 0.813: 30.81,11.22 30.83,11.22 31.37,11.76
S$209
  Bottom 0.813: 36.93,15.13 36.93,17.16 37.51,17.74 37.51,17.84 42.87,23.19 46.47,23.19 46.74,23.46
S$210
  Bottom 0.813: 37.29,16.62 37.37,16.62 43.32,22.56 43.32,21.52 38.68,16.89 38.68,16.93 43.36,21.62
S$211
  Bottom 0.813: 37.05,15.75 37.05,15.19 36.94,15.08 36.94,14.05 37.4,13.6 41.1,13.6 42.8,15.3 46.22,15.3 47.21,16.29 47.21,19.31 47.28,19.39
S$212
  Bottom 0.813: 43.79,15.46 43.79,15.48 43.18,16.09
S$213
  Bottom 0.813: 39.3,26.42 39.3,29.07 41.25,31.02 44.81,31.02 45.98,32.18 45.98,35.69 48.18,37.89 53.5,37.89 54.28,38.67 59.59,38.67 61.8,36.47 61.8,17.58 63.03,16.35 66.01,16.35 67.7,14.66 71.98,14.66 73.14,13.5 73.14,8.3 74.77,6.68
S$214
  Bottom 0.813: 68.22,7.01 72.24,7.01 73.99,5.26 99.46,5.26 101.15,6.94 101.15,13.17 99.53,14.79 97.13,14.79 94.67,17.26 93.63,17.26 93.37,17.52 93.37,19.27
S$215
  Bottom 0.813: 32.43,15.51 32.43,18.11
S$216
  Bottom 0.813: 28.22,25.44 38.5,25.44 39.27,26.2
S$217
  Bottom 0.813: 74.87,6.57 98.45,6.57 99.62,7.74 99.62,12.7 99.12,13.19 96.56,13.19 94.13,15.62 93.05,15.62 91.7,16.97 91.7,18.42 90.84,19.27
S$218
  Bottom 0.813: 61.01,0.73 26.47,0.73 24.6,2.6 24.6,75.19 27.03,77.62 47.47,77.62 48.5,76.59
S$219
  Top 0.813: 44.53,26.94 47.56,26.94 49.88,24.62 63.87,24.62 64.41,25.16
S$220
  Top 0.813: 50.26,28.89 64.09,28.89 64.41,28.56
S$221  (via drill 1 pad 2.54)
  other vias: 50.55,28.88
S$222  (via drill 1 pad 2.54)
  other vias: 64.36,28.57
S$223  (via drill 1 pad 2.54)
  other vias: 64.44,25.12
S$224
  Bottom 0.813: 64.57,24.94 64.57,20.35 68.52,16.4 72.73,16.4 74.68,14.46 74.68,10.94 75.38,10.24 88.94,10.24 89.15,10.46
S$225
  Bottom 0.813: 89.21,12.94 76.78,12.94 76.3,13.43 76.3,15.48 73.97,17.81 70.73,17.81 67.33,21.21 67.33,25.76 64.52,28.56
S$226
  Bottom 0.813: 79.54,15.48 79.54,17.7 80.29,18.46 82.51,18.46 83.43,19.37
S$227
  Bottom 0.813: 83.97,15.43 83.97,15.54 85.86,17.43 85.86,19.32 85.91,19.37
S$228
  Bottom 0.813: 88.99,15.48 88.99,17.48 88.34,18.13 88.34,19.48 88.29,19.54
S$229
  Bottom 0.813: 25.82,28.36 28.74,28.36 29.26,28.88 29.26,34.08 29.58,34.4 39.89,34.4
S$230
  Bottom 0.813: 24.79,28.3 28.74,28.3 29.45,29.01 29.45,33.88 29.84,34.27
S$231
  Bottom 1.93: 40.54,34.85 28.8,34.85 28.8,29.79 28.03,29.01 26.47,29.01 26.47,29.21 27.18,29.92
S$232  (via drill 1 pad 2.54)
  other vias: 47.3,60.84
S$233  (via drill 1 pad 2.54)
  other vias: 54.93,60.76
S$234
  Bottom 0.813: 44.23,60.62 47.02,60.62 47.28,60.88
S$235
  Bottom 1.676: 44.17,60.59 44.84,60.59 | 44.84,60.59 46.86,60.59 47.31,61.04 | 44.84,60.59 44.84,60.94 41.14,64.63 41.14,66.1 38.68,68.56
S$236
  Bottom 1.676: 38.57,68.56 38.57,70.25 37.45,71.37
S$237
  Bottom 1.93: 37.68,75.29 37.43,75.55
S$238
  Bottom 1.93: 28.16,76.01 28.22,76.07
S$239
  Bottom 1.93: 25.31,30.61 25.31,3.5 27.12,1.69
S$240
  Bottom 1.93: 27.64,30.16 27.64,28.67 26.28,27.3 26.28,16.09 27.83,14.53 27.83,4.93
S$241
  Bottom 1.93: 27.96,2.79 27.12,3.64 27.12,13.95 26.54,14.53 26.54,4.54 26.02,4.02
S$242
  Bottom 1.93: 27.96,36.43 37.02,36.43 37.3,36.71 29.74,36.71 28.62,37.83 37.67,37.83 37.86,37.64 30.58,37.64 29.18,39.05 36.55,39.05 36.64,39.14
S$243
  Top 1.016: 67.11,29.22 72.46,29.22
S$244
  Bottom 1.016: 28.42,6.43 28.42,2.97 30.57,0.82
S$245
  Bottom 1.016: 29.36,0.82 29.36,1.01 27.67,2.69
S$246
  Bottom 1.016: 162.42,0.72 165.27,0.72 168.19,3.63 171.49,3.63 171.56,3.57
S$247
  Bottom 1.016: 167.02,0.98 167.02,1.3 167.86,2.14
S$248
  Bottom 1.016: 167.8,1.36 167.34,1.36 167.21,1.24
S$249
  Bottom 1.016: 28.14,1.38 28.14,1.29 28.52,0.92
S$250
  Bottom 1.016: 26.74,0.64 22.35,0.64 21.79,1.2 21.79,6.9 24.69,9.8
S$251
  Bottom 1.016: 25.06,8.49 24.88,8.49 22.26,5.87 22.26,6.71 22.54,6.99 22.91,6.99 24.78,8.86 24.78,7.09 24.22,6.53 24.22,6.24 22.44,4.47 22.44,5.12 23.28,5.12 24.03,5.87 24.03,6.06 23.94,6.15 22.54,6.15 22.44,6.06 22.72,6.06 23.47,5.31 23.47,5.12 24.03,4.56 24.03,4 24.13,3.91 24.03,3.91 22.73,2.6 22.73,3.35 22.63,3.44 22.63,3.91 22.73,4 22.73,3.91 23.47,3.16 23.47,2.97 25.15,1.29 22.63,1.29 22.44,1.48 22.44,2.04 22.54,2.13 23.57,2.13 23.75,1.94 23.75,1.76 23.57,1.57
S$252
  Bottom 1.016: 53.34,7.38 53.34,7.27 54.8,5.81 54.8,5.38 54.63,5.21 52.96,5.21 52.37,5.81
S$253
  Bottom 0.406: 30.27,8.55 33.02,8.55 32.82,4.4 51.99,4.4 52.91,3.48 52.91,2.24 53.28,1.86 75.43,1.86 76.57,3
S$254
  Bottom 0.406: 60.95,4.67 59.06,4.67 56.96,6.78
S$255
  Bottom 0.406: 68.79,2.89 68.79,4.57 68.68,4.67
S$256
  Bottom 0.406: 68.68,3.7 65.01,3.7 64.3,4.4
S$257
  Bottom 0.406: 27.68,4.73 28.6,4.73 30.11,3.21 50.96,3.21 51.93,2.24 51.93,1.54 52.69,0.78
S$258
  Bottom 0.406: 52.1,1.11 31.19,1.11 29.08,3.21 29.08,3.7 29.03,3.75 29.14,3.75 29.57,3.32 29.57,3.11 29.95,2.73 29.95,3.27 29.35,3.86 28.92,3.86 28.76,4.02 28.76,3.81 29.35,3.21
S$259
  Bottom 1.422: 29.35,2.51 50.47,2.51 51.12,1.86 51.12,1.38 51.18,1.32 30.22,1.32 29.03,2.51
S$260
  Bottom 0.813: 78.2,0.78 78.2,1.3 78.91,2.01 78.91,2.92 79.63,3.63 100.96,3.63 102.77,5.45
S$261
  Bottom 0.813: 102.9,5.52 140.31,5.52 141.99,7.2
S$262
  Bottom 0.813: 78.78,0.84 78.78,1.17 79.5,1.88 79.5,2.53 79.76,2.79 137.91,2.79 141.99,6.88
S$263
  Bottom 0.813: 79.43,1.36 141.99,1.36 142.06,1.3
S$264
  Bottom 0.813: 79.5,1.82 142.19,1.82
S$265
  Bottom 0.813: 79.95,2.21 140.24,2.21 | 140.24,2.21 141.93,2.21 142.19,2.47 | 101.86,3.63 138.82,3.63 140.24,2.21
S$266
  Bottom 0.813: 100.31,3.24 138.49,3.24 138.88,2.86
S$267
  Bottom 0.813: 102.25,3.96 139.01,3.96 139.53,3.44
S$268
  Bottom 0.813: 102.51,4.35 139.01,4.35 139.21,4.54
S$269
  Bottom 0.813: 103.1,4.87 139.47,4.87 140.05,4.28
S$270
  Bottom 0.813: 140.96,19.99 147.12,19.99 147.31,20.18
S$271
  Bottom 0.813: 153.05,14.25 153.13,14.25 157.1,10.28 157.1,9.97 158.81,8.25 159.75,8.25 160.45,8.95
S$272
  Bottom 0.813: 142.32,7.16 147.06,7.16 151.03,11.13 156.71,11.13 158.5,9.34 161.07,9.34 161.93,8.49
S$273
  Bottom 0.813: 139.98,1.71 167.92,1.71 167.99,1.79
S$274
  Bottom 0.813: 141.77,1.32 168.23,1.32 168.38,1.17
S$275
  Bottom 0.813: 136.32,2.88 167.14,2.88 167.61,2.41
S$276
  Bottom 0.813: 141.77,2.02 167.68,2.02 168.31,1.4
S$277
  Bottom 0.813: 139.13,3.35 172.27,3.35 172.35,3.27
S$278
  Bottom 0.813: 138.74,3.89 169.08,3.89 169.32,4.13
S$279
  Bottom 0.813: 140.14,4.52 172.97,4.52 173.29,4.2
S$280
  Bottom 0.813: 140.06,5.06 171.73,5.06 171.81,5.14
S$281
  Bottom 0.813: 172.66,5.61 171.26,5.61 | 141.3,5.45 141.46,5.61 171.26,5.61 | 171.26,5.61 172.82,7.16 172.82,7.94 172.98,8.1 | 172.98,8.1 | 172.98,8.1 172.66,8.41 172.43,8.41 171.73,7.71 171.73,6.62 171.89,6.46 171.89,6.7 | 171.89,6.7 172.66,7.47 172.59,7.47 172.43,7.63 172.43,7.4 171.89,6.85 171.89,6.7 | 171.89,6.7 171.5,6.31
S$282
  Bottom 0.813: 172.35,6.15 142.16,6.15 142,6
S$283
  Bottom 0.813: 142.16,6.93 171.57,6.93 171.65,6.85
S$284
  Bottom 0.813: 148,7.4 172.2,7.4
S$285
  Bottom 0.813: 148.62,8.1 173.21,8.1 173.29,8.02
S$286
  Bottom 0.813: 148.46,8.64 171.96,8.64
S$287
  Bottom 0.813: 149.71,9.03 157.49,9.03 157.57,9.11
S$288
  Bottom 0.813: 150.02,9.73 157.1,9.73
S$289
  Bottom 0.813: 150.8,10.28 155.93,10.28 156.17,10.04
S$290
  Bottom 0.813: 151.2,10.7 156.71,10.7 156.78,10.64
S$291
  Bottom 0.813: 151.85,10.19 151.85,11.55 | 151.85,11.55 151.85,12.97 152.89,14.01 | 151.85,11.55 145.37,11.55 145.17,11.74 145.17,13.89 145.3,14.02
S$292
  Bottom 0.813: 153.21,13.75 153.21,13.49 152.43,12.71 152.43,11.74 152.82,11.35 152.95,11.35 153.53,11.94 154.31,11.94 154.7,11.55 154.64,11.55 153.73,12.46 153.73,12.84 153.6,12.97 | 153.6,12.97 | 153.6,12.97 153.66,12.91 153.66,12.71 152.89,11.94 | 152.89,11.94 | 152.89,11.94 153.27,11.55 153.92,11.55 154.05,11.68 154.7,11.68 154.9,11.48 155.03,11.48 155.15,11.35
S$293
  Bottom 0.813: 143.36,6.03 143.36,7.72 144.52,8.89
S$294
  Bottom 0.813: 147.83,11.87 146.92,11.87 146.08,12.72 146.08,13.82
S$295
  Bottom 0.813: 145.24,11.87 145.24,8.5 144,7.27
S$296
  Bottom 0.813: 145.88,11.16 145.88,8.11 145.3,7.53
S$297
  Bottom 0.813: 146.01,7.79 146.01,10.45 146.6,11.03 150.03,11.03 150.23,10.84 150.04,10.84 146.53,7.33 146.53,10.97 146.73,11.16 148.87,11.16 149.39,10.64 149.19,10.64 147.05,8.5 147.05,10.38 146.99,10.45 148.41,10.45 148.61,10.64 148.15,10.64 147.63,10.12 147.63,9.86 147.76,9.73
S$298
  Bottom 0.813: 144.13,14.54 144.13,9.21 141.74,6.81
S$299
  Bottom 0.813: 41.51,75.1 42.09,75.68
S$300
  Bottom 1.93: 40.73,75.42 41.25,75.94 41.25,76.46 41.05,76.66 27.25,76.66 25.5,74.91
S$301
  Bottom 0.813: 68.35,54.91 55.71,54.91 54.99,54.2
S$302  (via drill 1 pad 2.54)
  other vias: 54.8,54.2
S$303  (via drill 1 pad 2.54)
  other vias: 47.67,54.39
S$304
  Bottom 0.813: 44.3,51.28 44.75,51.28 47.73,54.26
S$305
  Bottom 0.813: 152.3,12.98 151.91,12.59 147.18,12.59 146.79,12.98
S$306
  Bottom 0.813: 151.65,11.68 151.59,11.74 145.82,11.74 146.01,11.94 146.01,13.69
S$307
  Bottom 0.813: 143.94,8.89 143.94,14.41 144.46,14.93 145.36,14.93 146.08,14.21 146.08,14.15 146.47,13.76 148.15,13.76 149.13,14.73 152.24,14.73 153.21,15.71 153.92,15.71 153.99,15.64 153.99,13.37 153.66,13.04
S$308
  Bottom 0.813: 153.27,15.12 153.27,13.69 153.08,13.5
S$309
  Bottom 0.813: 153.02,14.28 149.52,14.28 148.41,13.17 146.99,13.17 146.92,13.11 153.02,13.11
S$310
  Bottom 0.813: 149.51,13.5 151.52,13.5 152.11,14.08
S$311
  Bottom 0.813: 153.4,14.86 153.4,14.73 153.47,14.67
S$312
  Bottom 0.813: 146.01,13.69 145.63,13.69 144.98,14.34 144.98,9.15 144.65,8.83
S$313
  Bottom 0.813: 153.66,20.31 153.66,32.46 156,34.79
S$314
  Bottom 0.813: 156.84,24.99 156.84,28.69 159.82,31.67
S$315
  Bottom 0.813: 159.69,31.61 159.69,33.3 160.92,34.53
S$316
  Bottom 0.813: 168.34,0.45 179.66,0.45 180.22,1.01 180.22,77.84 179.44,78.63 22.2,78.63 21.75,78.18 21.75,0.67 21.87,0.56 178.76,0.56 179.66,1.46 179.66,76.94 178.65,77.95 178.54,77.95 | 178.54,77.95 22.09,77.95 21.98,77.84 21.98,1.12 21.64,0.79 178.09,0.79 179.21,1.91 179.21,77.28 178.54,77.95
S$317
  Bottom 0.813: 178.65,77.73 179.1,77.73 179.66,78.29
S$318
  Bottom 0.813: 179.87,78.39 179.87,76.93 179.66,76.72
S$319
  Bottom 0.813: 173.23,77.64 173.44,77.64 177.66,73.42
S$320
  Bottom 0.813: 174.31,77.64 174.36,77.64 177.71,74.28
S$321
  Bottom 0.813: 174.9,78.23 174.9,78.12 177.55,75.47
S$322
  Bottom 0.813: 176.09,78.18 176.09,77.2 178.85,74.45
S$323
  Bottom 0.813: 176.69,77.53 176.69,77.47 179.12,75.04
S$324
  Bottom 0.813: 177.17,78.07 177.17,77.96 178.79,76.34
S$325
  Bottom 0.813: 178.25,77.64 178.25,77.2 178.69,76.77
S$326
  Bottom 1.676: 178.04,74.99 178.04,4.63 177.92,4.52 177.38,4.52 177.14,4.75 177.14,68.86 176.13,69.87
S$327
  Bottom 1.676: 176.83,65.27 176.83,73.76 175.74,74.85
S$328
  Bottom 1.676: 168.35,1.56 177.3,1.56 178.93,3.19
S$329
  Bottom 1.676: 177.45,2.72 177.22,2.72 175.82,4.13
S$330
  Bottom 1.676: 176.68,3.97 176.91,3.97 177.84,3.04
S$331
  Bottom 1.676: 22.41,7.63 22.41,76.8 22.95,77.34 24.28,77.34 | 25.83,77.34 24.28,77.34 | 24.28,77.34 23.03,76.1 23.03,73.45 23.73,72.75 23.73,8.8
S$332
  Bottom 1.676: 40.25,46.57 44.28,46.57 46.75,49.04 46.75,48.8 52.57,42.98 52.57,41.18 51.79,40.4 46.76,40.4 41.26,34.9 41.26,37.81 42.37,37.81 45.96,41.41 50.89,41.41 51.45,41.97 51.45,42.76 46.97,47.24 46.64,47.24 45.07,45.67 41.93,45.67 41.48,45.22 41.48,44.21 41.93,43.76 43.61,43.76 44.28,44.43 44.28,43.98 41.59,41.29 41.59,40.39 41.03,39.83 42.15,39.83 44.28,41.97 44.28,43.99 45.74,45.44 45.18,45.44 41.82,42.08 41.82,41.07 41.93,40.96 41.93,40.51 45.73,40.51 47.75,42.53 47.75,43.76 48.43,44.43 45.63,44.43 44.73,43.54 45.96,43.54 46.19,43.76 46.19,45.11 46.75,45.67 | 46.75,45.67 46.75,45.78 | 46.75,45.67 46.75,44.1 47.19,43.65 47.19,43.42 46.3,42.53 45.85,42.53 44.62,41.29 44.62,41.07 42.71,39.16 42.71,38.82 42.15,38.26 42.15,43.76 43.05,44.66 47.98,44.66 49.88,42.75 49.44,42.75 48.99,42.3 48.87,42.42
S$333
  Bottom 1.676: 36.33,75.07 36.33,74.05 33.53,71.25 33.53,68.89 38.23,64.18 38.23,61.6 39.02,60.82 39.02,48.36 41.14,46.23 41.14,37.36 40.02,36.24 37.9,36.24 37.67,36.47 37.67,38.04 36.78,38.94 37.44,38.94 41.26,42.75
S$334
  Bottom 1.676: 40.58,41.29 40.58,39.61 38.79,37.81
S$335
  Bottom 1.676: 38.46,37.81 38.46,38.27 40.02,39.83
S$336
  Bottom 1.676: 40.25,37.81 40.25,37.7 39.24,36.69
S$337
  Bottom 1.676: 39.43,41.53 39.43,46.27 37.88,47.83 37.88,62.5 32.43,67.94 32.43,71.9 34.7,74.17 39.88,74.17 42.29,76.57
S$338
  Bottom 1.676: 35.02,75.08 34.25,75.08 31.33,72.16 31.33,67.81 36.97,62.17 36.97,39.32 38.53,37.77
S$339
  Bottom 1.676: 37.88,37.77 37.88,46.72 39.11,47.96
S$340
  Bottom 1.676: 35.67,38.29 35.67,64.05 36.06,64.44
S$341
  Bottom 1.676: 34.64,38.55 34.64,66.06 33.92,66.78
S$342
  Bottom 1.676: 33.14,39.13 33.14,67.17 33.4,67.42
S$343
  Bottom 1.676: 31.91,38.87 31.91,67.75 31.52,68.14
S$344
  Bottom 1.676: 30.49,39.26 30.49,74.82 29.97,75.34
S$345
  Bottom 1.676: 31.2,75.6 31.2,73.46 31.59,73.07
S$346
  Bottom 1.676: 31.91,75.41 31.91,73.85
S$347
  Bottom 1.676: 29.58,39.13 29.25,38.81
S$348
  Bottom 1.676: 28.48,74.69 30.42,76.64
S$349
  Bottom 1.93: 39.63,75.1 39.3,75.42 28.48,75.42 27.18,74.13
S$350
  Bottom 1.676: 22.1,43.11 36.89,43.11 37.16,43.38
S$351
  Bottom 1.676: 24.12,44.19 32.05,44.19
S$352
  Bottom 1.676: 28.69,42.04 28.69,40.15 29.76,39.07
S$353
  Bottom 1.676: 28.02,41.5 25.6,41.5 24.39,40.29 26,40.29 26.54,39.75 24.92,38.13 26.81,38.13 26.94,38 27.88,38 28.42,38.54 28.42,38.13 26.54,36.25 26.54,35.97 24.92,34.36 | 24.92,34.36 24.92,36.92 | 24.92,34.36 24.92,33.82 26.27,32.48 26.27,32.2 25.46,31.4 25.06,31.4 25.06,31.26 26.4,29.92 26.4,30.32 28.02,31.94 28.02,34.23 26.94,35.3 26.94,33.69 26.4,33.15 26.4,32.88 26.27,32.74 26.27,32.75 26.54,33.01 26.54,36.79 24.92,38.4 24.92,34.9 24.66,34.63
S$354
  Bottom 1.676: 23.31,73.01 28.55,73.01 29.76,74.22
S$355
  Bottom 1.676: 30.17,73.55 25.87,73.55 23.45,71.13
S$356
  Bottom 1.676: 23.98,71.13 28.95,71.13 30.3,72.47
S$357
  Bottom 1.676: 22.24,76.24 23.84,76.24 25.86,74.22 25.86,72.74 25.46,72.34 28.69,72.34 28.82,72.2
S$358
  Bottom 1.676: 24.92,73.82 24.92,75.03 24.25,75.71
S$359
  Bottom 1.676: 30.29,70.27 25.11,70.27
S$360
  Bottom 1.676: 30.16,44.25 30.16,70.01 29.64,70.53 29.64,45.94 28.48,44.77 26.4,44.77 24.98,46.2 24.98,68.78 26.14,69.95 28.41,69.95 29.51,68.84
S$361
  Bottom 0.305: 27.36,38.2 27.36,38.47 | 27.36,38.47 27.36,40.36 26.71,41.01 | 26.98,39.76 26.98,38.84 27.36,38.47
S$362
  Bottom 0.305: 27.25,38.57 27.25,38.74 26.93,39.06
S$363
  Bottom 0.305: 28.66,39.22 28.66,39.44 29.52,40.3 29.52,42.47 29.57,42.52
S$364
  Top 1.27: 47.77,54.28 54.93,54.28 55,54.2
S$365
  Top 3.81: 37.89,71.1 37.89,69.39 40.61,66.66 40.61,66.51 42.48,64.64 42.48,62.92 44.35,61.06 53.76,61.06 54.38,60.43
S$366
  Top 1.27: 54.93,54 54.93,54.08 55.78,54.94 162.04,54.94 162.51,55.4 162.51,72.47 150.06,72.47
S$367
  Top 1.27: 21.76,0.79 179.72,0.79 179.94,1.01 179.94,78.29 179.72,78.51 22.44,78.51 21.76,77.84 21.76,1.46 22.1,1.12
S$368
  Top 1.27: 32.75,6.93 32.75,10.28 34.7,12.23 34.7,15.5 35.01,15.81
S$369
  Top 1.27: 37.34,7.71 40.68,7.71 44.58,11.6 44.58,6.7 45.05,6.23 50.73,6.23 51.97,7.48
S$370
  Top 1.27: 44.81,16.59 44.81,21.19 44.89,21.26
S$371
  Top 1.27: 37.65,15.34 40.68,15.34 44.73,19.39
S$372
  Top 1.27: 43.83,51.26 44.84,51.26 47.75,54.17
S$373
  Bottom 0.406: 13.06,64.54 12.75,64.54 9.07,64.63 9.07,61.6 9.07,59.81 9.07,56.95 9.08,56.26 9.08,40.68
S$374
  Bottom 0.406: 8.3,64.55 8.29,41.43
S$375
  Bottom 0.406: 7.46,43 7.45,41.91 7.1,41.6 5.56,41.6
S$376
  Bottom 0.406: 7.47,42.98 7.49,62.39
S$377
  Bottom 0.406: 8.3,64.18 8.25,71.58
S$378
  Bottom 0.406: 7.49,62.39 7.49,66.17
S$379
  Bottom 0.406: 8.27,71.68 6.63,71.68
S$380
  Bottom 0.406: 2.88,64.55 2.88,69.81 4.91,71.84 6.44,71.84 6.56,71.71
S$381
  Bottom 0.406: 5,67.21 6.39,67.22 7.48,66.11
S$382
  Bottom 0.406: 9.87,12.84 7.23,12.84 5.97,14.1 5.97,18.46 6.08,18.58
S$383
  Bottom 0.406: 9.87,14.87 9.1,14.87 8.6,15.36 8.6,18.35 8.76,18.5
S$384
  Bottom 0.406: 16.57,18.25 13.61,18.31 13.58,18.27 13.35,18.27 9.94,14.87
S$385
  Bottom 0.406: 11.28,18.46 11.28,19.38 10.73,20.53 6.75,20.53 6.08,19.53 6.08,18.73 6.16,18.65
S$386
  Top 0.406: 8.52,36.37 8.52,57.4 8.07,57.86 8.07,71.49 4.89,74.67 2.82,74.67 2.69,74.8
S$387
  Bottom 0.406: 12.34,12.83 12.34,11.22 12.07,10.94 7.43,10.94 5.04,13.33 5.04,16.66 4.2,17.24 4.2,19.87 5.23,20.8 5.23,22.6 6.19,23.56 6.19,26.04
S$388
  Bottom 0.406: 12.49,14.95 13.42,14.95 13.86,14.51 13.86,8.78 10.28,5.2 6.42,5.2 2.62,1.4
S$389
  Bottom 0.406: 2.46,4.1 2.46,6.3 2.79,6.63
S$390
  Bottom 0.406: 2.46,14.18 4.22,14.18 5.65,12.75
S$391
  Bottom 1.016: 2.43,1.38 2.43,1.52 2.5,1.59
S$392
  Bottom 1.016: 2.72,3.99 2.67,3.99 2.63,4.04
S$393
  Bottom 1.016: 2.4,6.57 2.41,6.57
S$394
  Bottom 1.016: 2.3,14.15 2.4,14.15 2.43,14.18
S$395
  Bottom 0.406: 6.29,26.17 8.74,26.17 8.85,26.06
S$396
  Bottom 0.406: 13.59,25.96 13.59,27.76 13.59,29.1 13.57,29.05 13.56,27.92
S$397
  Bottom 0.406: 11.35,25.77 11.35,25.94 11.07,28.44 11.07,28.99 11.05,28.78
S$398
  Bottom 0.406: 8.85,26.12 8.85,25.41 10.59,23.67 14.23,23.67 14.77,24.43 14.78,27.99 16.11,28.87
S$399
  Bottom 0.406: 16.62,31.99 14.63,31.98 10.27,31.98 8.57,31.97 8.59,36.38 8.71,36.65
S$400
  Bottom 0.406: 5.54,41.66 5.96,41.58 5.56,41.58
S$401
  Bottom 0.406: 6.2,26.14 6.19,26.22 6.55,28.13
S$402
  Bottom 0.406: 8.54,28.79 7.36,28.79 7.34,30.65 7.35,39.05 7.34,40.17
S$403
  Bottom 0.406: 7.34,40.21 7.9,40.87 8.29,41.4
S$404
  Bottom 0.406: 8.56,36.02 8.53,38.45 8.57,38.51 9.05,39.21 9.07,40.62
S$405
  Bottom 0.406: 11.1,38.11 9.88,38.54 9.88,39.8
S$406
  Bottom 0.406: 13.61,36.5 13.61,38.01 10.58,39.08 10.58,39.5 10.58,39.69
S$407
  Bottom 0.406: 16.11,37.41 16.11,37.98 11.33,39.65
S$408
  Bottom 0.406: 12.47,14.69 12.47,14.74 14.6,16.87 16.86,16.87 17.5,17.5 17.5,24.44 16,25.94
S$409
  Bottom 0.406: 12.53,61.82 10.03,61.82 9.88,61.67
S$416
  Bottom 0.406: 11.14,36.79 11.14,38.03 11.05,38.12
S$417
  Bottom 0.406: 6.54,26.25 6.54,30.76 4.67,32.63
S$418
  Bottom 0.406: 4.61,35.11 4.61,35.98 5.94,37.32 5.94,41.2 5.74,41.4
S$419
  Bottom 0.406: 3.14,56.65 2.13,56.65 0.75,55.54 0.75,31.52 2.67,29.69 4.2,29.69 4.54,30.02
S$420
  Bottom 0.406: 16.25,25.85 16.33,25.85 17.53,27.05 17.53,30.09 17.55,31.98 16.7,31.98 15.19,32
S$421
  Bottom 0.406: 4.59,32.44 4.59,35.1 4.41,35.29
S$422
  Bottom 0.406: 11.41,67.21 11.41,68.21 9.62,69.99 9.62,74.21 9.34,74.49
S$423
  Top 0.406: 13.12,56.74 10.78,56.74 9.72,57.8
S$424
  Top 0.406: 11.94,74.53 11.94,74.52 9.47,72.06 9.47,58.02 10.12,57.36
S$425
  Bottom 0.406: 13.12,64.55 13.12,69.77 14.72,71.37 14.72,74.31 14.53,74.49
S$426
  Bottom 0.406: 4.69,71.52 4.69,72.9 8.78,77 9.25,77 9.31,77.06
S$427
  Bottom 0.406: 11.97,77.09 11.97,77.15 13.22,78.4 15.47,78.4 16,77.87 16,66.74 17.53,65.21 17.53,62.21 17.09,61.77 15.69,61.77 15.59,61.86
S$428
  Top 0.406: 14.44,77.4 14.44,77.24 16.97,74.71 16.97,65.93 17.59,65.3 17.59,59.71 17.4,59.52 15.72,59.52 15.56,59.36
S$429
  Top 0.406: 11.09,36.82 11.09,35.65 9.54,34.1 7.66,34.1 6.75,35.01 6.75,36.11 4.68,38.19 2.54,38.19 1.89,37.54 1.89,29.29 2.09,29.1
S$430
  Top 0.406: 2.69,14.06 2.69,15.68 2.36,16.01
S$431
  Top 0.406: 2.31,23.36 2.31,24.5 2.96,25.14
S$432
  Top 0.406: 2.85,27.58 2.85,28.33 2.05,29.14
S$433
  Bottom 0.406: 1.17,0 19.55,0 19.55,79.07 0.05,79.07 -0.03,0.02 2.66,0.02
(copper drawn outside any net)
  shapes: Bottom circle x16

## Text on the board
Bottom: OPENHARDWARE.CO.ZA
tPlace: TinyDuino | TEMP SENSORS | 12V OUT | X-Axis | Y-Axis | Z-Axis | Extruder | BED | EXT | reset | 10K | ATX Molex | RST | 5V | 10uF | ICSP Programmer and Prototyper | RX | 16 | TX | 15 | 100pF | 100pF | 100pF | 100pF | 100uF | 100pF | 100pF | 100pF | 2 | 100pF | 14 | 3 | 13 | 4 | 12 | 1k | 1k | 1k | 1k | 5 | 11 | 100uF | 6 | TARGET SOCKET | 10 | MS | MS | MS | MS | 7 | 9 | 8 | GND | 100nF | Microstep Jumpers: | 3D Printer Controller | 100nF | Half Step | 4K7 | 4K7 | Preprog | ATTiny45 | VUSBtiny | 22pF | 22pF | Eighth Step | 100uF | 8/20pin | ATX-24 Power Supply 400w | MOSFET | Sixteenth Step | D16/2 | ICSP | 100uH | MOSFET | 68R | 68R | 2K2 | 220R | 220R | HEATER ON | hotend | bed | 20Mhz | 100nF | OpenHardware.co.za | GND | CTS | 5V | TX | RX | DTR | RESET | openhardware.co.za | 100uF | 220R | X-min | 22pF | 22pF | ATX ON | STANDBY | USB | LED | LED | Z-min | Y-min | heatbed | hotend